# EAGLE board USB-Interface V1.0 (EAGLE 7.6.0)
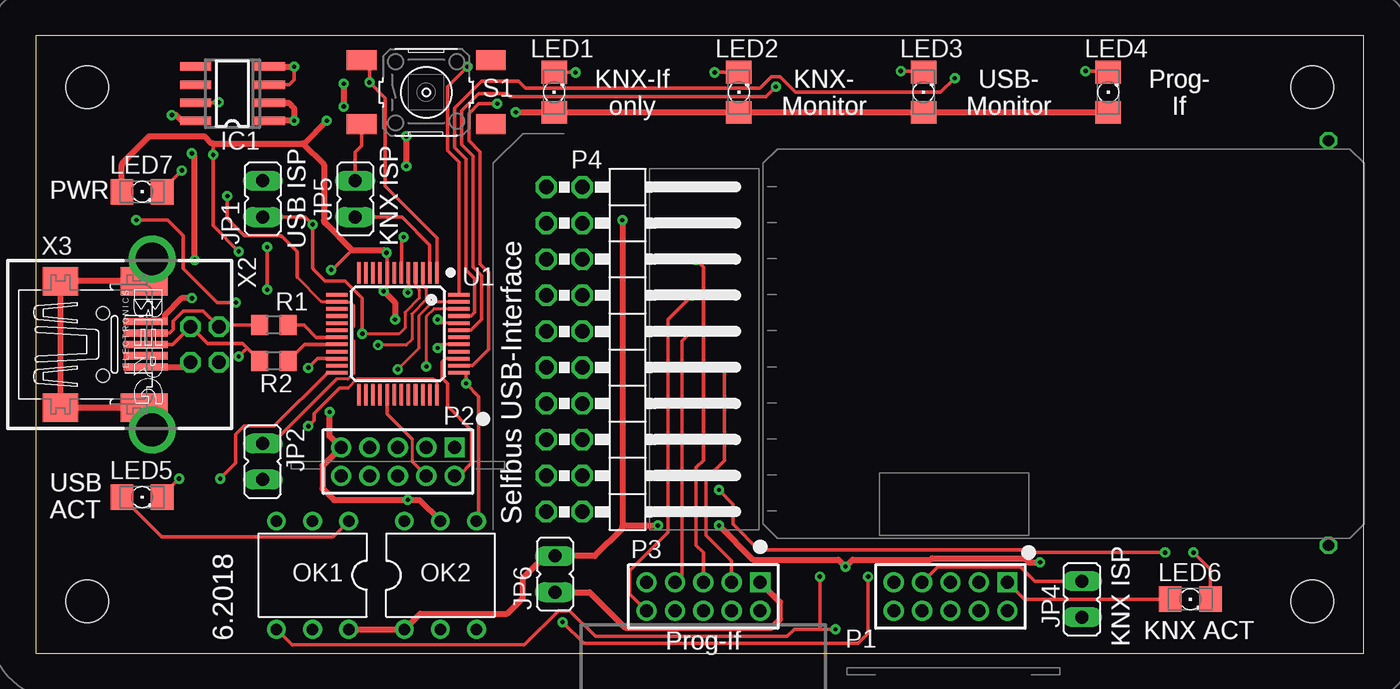
[diagram p0: board, top side]
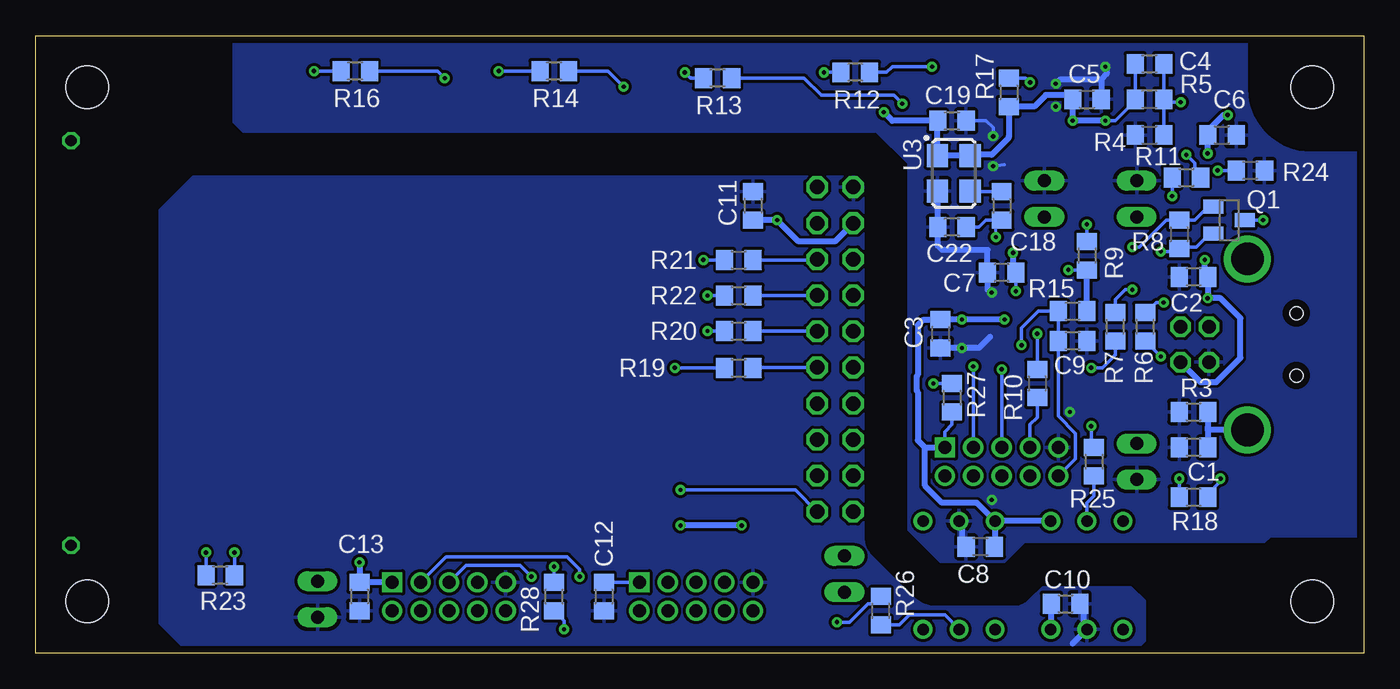
[diagram p1: board, bottom side, seen from below]

Size 93.5 x 43.5 mm. Coordinates in mm from the lower left corner, seen from the top.
Outline: 0,0 93.5,0 93.5,43.5 0,43.5 0,0
Copper layers (1*16): Top 0.035mm / dielectric 1.5mm / Bottom 0.035mm
Design rules "default *": minimum track width 8mil, minimum drill 0.3mm, track to track 8mil, track to pad 8mil, pad to pad 8mil, via to via 8mil, smd to smd 8mil, copper to edge 0.5mm, drill to drill 8mil, minimum pad ring 10mil, minimum via ring 8mil, stop-mask expansion 4mil, vias tented up to drill 0mil, thermal gap 10mil
Holes 3 mm at 89.85,3.65 3.65,39.85 89.85,39.85 3.65,3.65

## Footprints (pad centres in the part's own frame; a part is rotated, then mirrored left to right if it is on the bottom)
R0805M = smd 1.2 x 1.4: 1 -1,0; 2 1,0
SO08 = smd 0.6 x 2.2: 1 -1.905,-2.6; 2 -0.635,-2.6; 3 0.635,-2.6; 4 1.905,-2.6; 5 1.905,2.6; 6 0.635,2.6; 7 -0.635,2.6; 8 -1.905,2.6
JP1 = drill 0.914 long: 1 0,-1.27; 2 0,1.27
1206 = smd 1.6 x 1.803: A -1.422,0; C 1.422,0
DIL06S = drill 0.813: 1 -2.54,-3.81; 2 0,-3.81; 3 2.54,-3.81; 4 2.54,3.81; 5 0,3.81; 6 -2.54,3.81
2X05M = drill 0.914 square: 1 -4,-1 | drill 0.914: 2 -4,1; 3 -2,-1; 4 -2,1; 5 0,-1; 6 0,1; 7 2,-1; 8 2,1; 9 4,-1; 10 4,1
2X10/90 = drill 1.016 octagon: 1 -11.43,-6.35; 2 -11.43,-3.81; 3 -8.89,-6.35; 4 -8.89,-3.81; 5 -6.35,-6.35; 6 -6.35,-3.81; 7 -3.81,-6.35; 8 -3.81,-3.81; 9 -1.27,-6.35; 10 -1.27,-3.81; 11 1.27,-6.35; 12 1.27,-3.81; 13 3.81,-6.35; 14 3.81,-3.81; 15 6.35,-6.35; 16 6.35,-3.81; 17 8.89,-6.35; 18 8.89,-3.81; 19 11.43,-6.35; 20 11.43,-3.81
SOT23-BEC = smd 1 x 1.4: B -0.95,-1.1; C 0,1.1; E 0.95,-1.1
B3F-10XX_SMD = smd 2.1 x 1.4: 1 -4.55,2.25; 2 4.55,2.25; 3 -4.55,-2.25; 4 4.55,-2.25
LQFP48 = smd 1.5 x 0.25: 1 -4.3,2.75; 2 -4.3,2.25; 3 -4.3,1.75; 4 -4.3,1.25; 5 -4.3,0.75; 6 -4.3,0.25; 7 -4.3,-0.25; 8 -4.3,-0.75; 9 -4.3,-1.25; 10 -4.3,-1.75; 11 -4.3,-2.25; 12 -4.3,-2.75; 25 4.3,-2.75; 26 4.3,-2.25; 27 4.3,-1.75; 28 4.3,-1.25; 29 4.3,-0.75; 30 4.3,-0.25; 31 4.3,0.25; 32 4.3,0.75; 33 4.3,1.25; 34 4.3,1.75; 35 4.3,2.25; 36 4.3,2.75 | smd 0.25 x 1.5: 13 -2.75,-4.3; 14 -2.25,-4.3; 15 -1.75,-4.3; 16 -1.25,-4.3; 17 -0.75,-4.3; 18 -0.25,-4.3; 19 0.25,-4.3; 20 0.75,-4.3; 21 1.25,-4.3; 22 1.75,-4.3; 23 2.25,-4.3; 24 2.75,-4.3; 37 2.75,4.3; 38 2.25,4.3; 39 1.75,4.3; 40 1.25,4.3; 41 0.75,4.3; 42 0.25,4.3; 43 -0.25,4.3; 44 -0.75,4.3; 45 -1.25,4.3; 46 -1.75,4.3; 47 -2.25,4.3; 48 -2.75,4.3
ASF = smd 1.6 x 1.5: 1 -1.25,-1.15; 2 1.25,-1.15; 3 1.25,1.15; 4 -1.25,1.15
PN61729-S = drill 0.95 octagon: 1 1.25,4.71; 2 -1.25,4.71; 3 -1.25,2.71; 4 1.25,2.71 | drill 2.3 pad 2.9: S1 -6.02,0; S2 6.02,0
32005-201 = smd 3.1 x 0.5: 1 3,1.6; 2 3,0.8; 3 3,0; 4 3,-0.8; 5 3,-1.6 | smd 2.5 x 2: M1 -3,-4.45; M2 -3,4.45 | smd 3.3 x 2: M3 2.9,4.45; M4 2.9,-4.45 | hole 0.9: 0,2.2; 0,-2.2

## Placement (x,y rotation side)
C1  10n  [R0805M]  12,14.5 180 bottom
C2  10n  [R0805M]  12,26.5 180 bottom
C3  100n  [R0805M]  29.8,22.5 270 bottom
C4  -  [R0805M]  15.1,41.5 0 bottom
C5  1u0  [R0805M]  19.5,39 0 bottom
C6  1u0  [R0805M]  10,36.5 0 bottom
C7  100n  [R0805M]  25.5,26.8 180 bottom
C8  100n  [R0805M]  27,7.5 180 bottom
C9  10n  [R0805M]  20.5,22 180 bottom
C10  100n  [R0805M]  21,3.5 0 bottom
C11  100n  [R0805M]  43,31.5 270 bottom
C12  100n  [R0805M]  53.5,4 270 bottom
C13  100n  [R0805M]  70.7,4 270 bottom
C18  100p  [R0805M]  25.5,31.5 270 bottom
C19  100n  [R0805M]  29,37.5 0 bottom
C22  220p  [R0805M]  29,30 180 bottom
IC1  LP2951CM  [SO08]  13.87,39.4 90 top
JP1  [JP1]  16,32 0 top
JP2  [JP1]  16,13.5 180 top
JP4  [JP1]  73.66,3.81 180 top
JP5  [JP1]  22.5,32 0 top
JP6  [JP1]  36.56,5.58 0 top
LED1  [1206]  36.5,39.5 90 top
LED2  [1206]  49.5,39.5 90 top
LED3  [1206]  62.5,39.5 90 top
LED4  [1206]  75.5,39.5 90 top
LED5  [1206]  7.5,11 0 top
LED6  [1206]  81.28,3.81 0 top
LED7  [1206]  7.5,32.5 0 top
OK1  H11L1M  [DIL06S]  19.5,5.5 180 top
OK2  H11L1M  [DIL06S]  28.5,5.5 0 top
P1  ISP KNX-uC  [2X05M]  64.4,4 180 top
P2  ISP USB-uC  [2X05M]  25.5,13.5 180 top
P3  ISP USR-uC  [2X05M]  47,4 180 top
P4  [2X10/90]  42.3,21.4 270 top
Q1  BC857  [SOT23-BEC]  9.5,30.5 270 bottom
R1  33R  [R0805M]  16.78,23.13 180 top
R2  33R  [R0805M]  16.78,20.59 180 top
R3  100k  [R0805M]  12,17 0 bottom
R4  68k  [R0805M]  15.1,36.5 0 bottom
R5  120k  [R0805M]  15.1,39 180 bottom
R6  1k5  [R0805M]  15.4,23 90 bottom
R7  3k  [R0805M]  17.5,23 90 bottom
R8  24k  [R0805M]  13,29.5 270 bottom
R9  24k  [R0805M]  19.5,28 270 bottom
R10  330R  [R0805M]  23,19 270 bottom
R11  24k  [R0805M]  12.5,33.5 0 bottom
R12  1k5  [R0805M]  35.8,40.9 180 bottom
R13  1k5  [R0805M]  45.5,40.5 180 bottom
R14  1k5  [R0805M]  57,41 180 bottom
R15  100k  [R0805M]  20.5,24.1 0 bottom
R16  1k5  [R0805M]  71,41 180 bottom
R17  -  [R0805M]  25,39.5 270 bottom
R18  1k5  [R0805M]  12,11 0 bottom
R19  330R  [R0805M]  44,20.1 0 bottom
R20  330R  [R0805M]  44,22.7 0 bottom
R21  330R  [R0805M]  44,27.7 0 bottom
R22  330R  [R0805M]  44,25.2 0 bottom
R23  1k5  [R0805M]  80.5,5.5 180 bottom
R24  1k5  [R0805M]  8,34 180 bottom
R25  1k  [R0805M]  19,13.5 270 bottom
R26  1k  [R0805M]  34,3 90 bottom
R27  1k5  [R0805M]  29,18 270 bottom
R28  1k5  [R0805M]  57,4 90 bottom
S1  [B3F-10XX_SMD]  27.5,39.5 0 top
U1  LPC11U24FBD48/401  [LQFP48]  25.5,22.5 270 top
U3  XO32 12MHz  [ASF]  28.87,33.8 270 bottom
X2  PN61729-S  [PN61729-S]  8.2,21.75 270 top
X3  32005-201  [32005-201]  4.75,21.75 0 top

## Library data of the parts
C1-C13 C18 C19 C22 R1-R28 = rcl
IC1 = linear
JP1 JP2 JP4-JP6 = jumper
LED1-LED7 = led
OK1 OK2 = optocoupler
P1-P3 = pinhead-2
P4 = pinhead
Q1 = transistor-pnp
S1 = switch-omron
U1 = microbuilder
U3 = crystal
X2 = con-berg; OC_FARNELL: unknown; OC_NEWARK: unknown
X3 = con-cypressindustries; OC_FARNELL: unknown; OC_NEWARK: unknown

## Nets
+3V3: C3.1 C4.1 C5.1 C7.1 C8.1 C19.1 IC1.1 IC1.2 LED1.A LED2.A LED3.A LED4.A LED5.A LED7.A OK1.1 OK2.6 P2.1 Q1.E R5.2 R8.2 R9.2 R11.2 R15.2 R17.2 R27.2 U1.8 U1.44 U3.1 U3.4
+5V: C2.1 C6.1 IC1.8 X2.1 X3.1
/ISP_EN: JP1.1 R9.1 R10.1 U1.4
/RESET: C9.2 P2.10 R15.1 U1.3
GND: C1.2 C2.2 C3.2 C5.2 C6.2 C7.2 C8.2 C9.1 C19.2 C22.2 IC1.3 IC1.4 JP1.2 JP2.2 JP5.2 OK2.5 P2.9 R3.1 R4.1 R24.1 S1.3 U1.5 U1.41 U3.2 X2.4 X3.5
GNDA: C10.2 C11.1 C12.2 C13.2 JP4.2 OK1.5 P1.9 P3.9 P4.1
ISP_EN1: JP2.1 R11.1 U1.14
ISP_EN_EXT: P2.7 R10.2
ISP_RXD: P2.3 U1.46
ISP_TXD: P2.5 U1.47
K_ISP_EN: JP4.1 P1.7
K_RXD: OK1.4 P1.3 R28.1
K_TXD: P1.5 R26.2
N$1: R1.1 U1.19
N$2: R2.1 U1.20
N$3: JP5.1 U1.2
N$4: R1.2 X2.2 X3.2
N$5: R2.2 R6.1 X2.3 X3.3
N$6: C1.1 R3.2 X2.S1 X2.S2 X3.M1 X3.M2 X3.M3 X3.M4
N$7: Q1.B R7.2 R8.1
N$8: C4.2 IC1.7 R4.2 R5.1
N$9: Q1.C R6.2
N$10: R7.1 U1.22
N$11: LED6.C R23.2
N$12: P4.20 R23.1
N$13: R17.1 S1.1 U1.1
N$14: LED1.C R12.2
N$15: LED2.C R13.2
N$16: C18.1 U3.3
N$17: LED3.C R14.2
N$18: LED4.C R16.2
N$20: R16.1 U1.45
N$21: R14.1 U1.43
N$22: C18.2 C22.1 U1.6
N$23: R13.1 U1.38
N$24: R12.1 U1.48
N$25: LED7.C R24.2
N$27: R18.1 U1.24
N$28: LED5.C R18.2
N$29: P3.7 R20.1
N$30: C12.1 JP6.1 P3.1
N$31: OK1.2 R25.2
N$32: P3.10 R22.1
N$33: P3.5 R21.1
N$34: P3.3 R19.1
N$35: OK2.2 R26.1
SWCLK: P2.4 U1.29
SWDIO: P2.2 U1.39
SWUART_RX: P4.6 R21.2
SWUART_TX: P4.12 R19.2
U_RXD: OK2.4 R27.1 U1.37
U_TXD: R25.1 U1.36
USR_ISP: P4.10 R20.2
USR_RST: P4.8 R22.2
V+: C10.1 C11.2 C13.1 JP6.2 LED6.A OK1.6 OK2.1 P1.1 P4.3 R28.2

## Tracks (layer width: path | path; a pad name or v marks a point on that pad's centre or on a via)
+3V3  (via drill 0.3)
  Top 0.203: U1.44 28.55,23.25 v28.3,23.5
  Top 0.254: v24.5,25.5 24.75,25.75 U1.8 24.75,28.18 arc45 v24.7,28.2 | v20.8,27 v20.8,27 arc45 20.97,27.07 22.3,28.4 | 12.5,35.9 v12.5,35.1 12.5,30.1 v14.3,28.3 | LED5.A 8.8,8.27 arc45 8.98,8.2 20.82,8.2 arc45 21,8.27 OK1.1
  Top 0.406: v24.5,25.5 25.3,24.7 v25.3,23.5 | IC1.1 v18.2,37.5 18.2,38.4 17.84,38.77 IC1.2 | LED7.A 6.08,34.37 arc-45 6.15,34.55 8,36.4 11.9,36.4 12.4,35.9 12.5,35.9 18.8,35.9 | LED4.A LED3.A LED2.A LED1.A 36.48,38.1 v33.8,38.1 | v24.7,28.2 24.5,28.4 22.3,28.4 20.37,30.33 arc-45 20.3,30.5 20.3,34.4 18.8,35.9 | 18.8,35.9 18.9,35.9 v20.5,37.5
  Bottom 0.254: v24.5,25.5 C7.1 | C4.1 R5.2 16.1,38.9 17.5,37.5 v18.2,37.5 | Q1.E 10.85,29.55 11.8,28.6 12.9,28.6 R8.2 13,28.6 13.13,28.47 arc45 13.3,28.3 v14.3,28.3 | R9.2 v20.8,27 | R11.2 arc-45 11.57,33.67 11.9,34 11.9,34.5 v12.5,35.1 | R27.2 29,16.1 29.5,15.6 P2.1
  Bottom 0.406: 30.9,14.5 31.4,15 31.4,18.4 31.5,18.5 31.5,19.5 31.4,19.6 31.4,23.1 31,23.5 C3.1 v28.3,23.5 v25.3,23.5 | 30.9,14.5 P2.1 | OK2.6 25.96,7.54 C8.1 | OK1.1 OK2.6 | OK2.6 27.25,10.6 29.7,10.6 30.9,11.8 30.9,14.5 | R15.2 R9.2 | v18.2,37.5 v20.5,37.5 C5.1 20.5,39.3 22.4,39.3 23.2,38.5 R17.2 25,36.41 arc45 25.07,36.23 26.2,35.1 27.6,35.1 arc-45 U3.4 U3.1 30.02,37.48 C19.1 33.2,37.5 v33.8,38.1 | v24.7,28.2 24.7,27.11 arc-45 24.63,26.93 C7.1
+5V  (via drill 0.3)
  Top 0.406: v11,25 10.3,25 9.1,23.8 9.1,23.4 7.8,23.4 X3.1 | v11.2,27.7 11.2,35 v11,35.2 | v9.6,37.9 9.9,37.9 10.3,37.5 IC1.8
  Bottom 0.406: X2.1 11.51,19.1 10.4,19.1 8.7,20.8 8.7,23.6 10.1,25 v11,25 C2.1 arc90 11.2,26.7 v11.2,27.7 | v11,35.2 C6.1 11,36.8 9.9,37.9 v9.6,37.9
/ISP_EN  (via drill 0.3)
  Top 0.203: U1.4 26.75,25.85 27,25.6 27,25 26,24 26,22.9 25.6,22.5 v23,22.5
  Top 0.254: v23,22.5 23,25 21.8,26.2 20.4,26.2 19.57,27.03 arc-45 19.5,27.2 v19.5,30.2 18.97,30.73 JP1.1
  Bottom 0.254: R10.1 v23,22.5 | v19.5,30.2 R9.1
/RESET  (via drill 0.3)
  Top 0.203: U1.3 27.25,25.95 27.5,25.7 27.5,24.9 26.5,23.9 26.5,22.1 26.1,21.7 v24.1,21.7
  Bottom 0.254: P2.10 20.3,13.7 20.3,15.5 21.5,16.7 C9.2 R15.1 22.9,24.1 24.1,22.9 v24.1,21.7
GND  (via drill 0.3)
  Top 0.203: U1.5 26.25,25.45 v26.2,25.4 | U1.41 28.55,21.75 v28.3,21.5
  Top 0.254: JP5.2 22.5,35.3 22.95,35.75 S1.3 | IC1.3 17.84,40.03 18.2,40.4 v18.2,41.3
  Top 0.406: OK2.5 27.01,10.8 v26.2,10.8 21,10.8 20.2,11.6 20.2,13.2 P2.9 20.7,15.3 v20.7,17 | X3.5 10.56,20.15 X2.4 | IC1.4 18,41.3 v18.2,41.3 | v26.1,36.4 v26.1,34.3 | v21.7,40.1 v21.7,38.5
  Bottom 0.254: C19.2 26.6,37.5 26.1,37 v26.1,36.4 | v26.1,34.3 25.3,34.4
  Bottom 0.406: v26.2,25.4 26.5,25.6 C7.2 26.5,28.4 29.7,28.4 30,28.7 C22.2 30,32.53 U3.2 | C3.2 v28.3,21.5 27.1,21.5 26.3,22.3 | OK2.5 28.3,9.11 28.3,7.5 C8.2 | v18.2,41.3 18.1,40.8 18.5,40.4 | 18.5,40.4 C5.2 | 18.5,40.4 21.4,40.4 v21.7,40.1
  pour Bottom: 32.1,8.7 29.8,6.4 25.3,6.4 23.9,7.8 7,7.8 6.6,8.2 0,8.2 0,35.3 3.8,35.3 arc90 8.2,39.7 8.2,43.5 79.6,43.5 79.6,37.4 78.9,36.7 34.3,36.7 32.1,34.5
GNDA
  Bottom 0.406: C10.2 19.7,3.5 19.7,1.89 OK1.5 20.49,0.7
  pour Bottom (rank 2): 35.7,33.6 82.4,33.6 84.8,31.2 84.8,2.1 82.8,0.1 16.2,0.1 15.4,0.9 15.4,3.7 16.4,4.7 22.6,4.7 23.5,3.8 arc45 24.7,3.3 30.3,3.3 arc40 32,4.2 34.5,6.7 arc52 35.2,8.4 35.2,33.1
ISP_EN1  (via drill 0.3)
  Top 0.203: 21.2,19.3 22,19.3 22.4,19.7 22.4,22 22.3,22.1 22.3,22.9 22.4,23 22.4,24.5 22.15,24.75 U1.14 20.15,24.75 18.4,26.5 | 16.03,14.8 JP2.1
  Top 0.254: 21.2,19.3 16.7,14.8 16.03,14.8 | v13.5,32.2 13.5,30.6 14.63,29.47 arc45 14.8,29.4 17.2,29.4 arc-45 17.37,29.33 18.4,28.3 18.4,26.5
  Bottom 0.254: v13.5,32.2 R11.1
ISP_EN_EXT
  Bottom 0.254: R10.2 23,16.6 23.5,16.1 P2.7
ISP_RXD  (via drill 0.3)
  Top 0.203: U1.46 28.05,24.25 27.5,23.7 v27.5,20.2
  Bottom 0.254: P2.3 v27.5,20.2
ISP_TXD  (via drill 0.3)
  Top 0.203: U1.47 27.95,24.75 27,23.8 27,21.5 v25.5,20
  Bottom 0.254: P2.5 v25.5,20
K_ISP_EN
  Top 0.254: P1.7 63.5,6.1 69.3,6.1 70.32,5.08 JP4.1
K_RXD  (via drill 0.3)
  Top 0.254: OK1.4 18.07,0.6 34.4,0.6 36.8,3 37.6,3 39.4,1.2 52.9,1.2 53.4,1.7 55.2,1.7 | v56.3,1.7 55.2,1.7 | v55.2,5.4 55.2,1.7
  Bottom 0.254: R28.1 56.3,2.3 v56.3,1.7 | P1.3 64.6,6.8 56.1,6.8 55.2,5.9 v55.2,5.4
K_TXD  (via drill 0.3)
  Top 0.254: v37.1,2.2 38.6,0.7 57.9,0.7 58.6,1.4 v58.6,5.4
  Bottom 0.254: v37.1,2.2 36.2,2.2 34.9,3.5 34.7,3.5 34.2,4 R26.2 | P1.5 63.2,6.2 59.4,6.2 v58.6,5.4
N$1
  Top 0.254: U1.19 19.75,22.25 18.9,23.1 17.81,23.1 R1.1
N$2
  Top 0.254: U1.20 18.94,21.75 R2.1
N$3
  Top 0.203: 22.53,30.7 JP5.1
  Top 0.254: U1.2 27.75,28.75 25.8,30.7 22.53,30.7
N$4
  Top 0.254: X3.2 9.45,22.55 9.7,22.8 9.7,23.4 10.4,24.1 11.81,24.1 X2.2 13.04,23.13 R1.2
N$5  (via drill 0.3)
  Top 0.254: 14.88,21.48 14.57,21.8 12.11,21.8 X2.3 9.66,21.75 X3.3 | 14.88,21.48 R2.2 | v14.3,20.9 14.88,21.48
  Bottom 0.254: R6.1 v14.3,20.9
N$6
  Top 0.406: X2.S2 7.72,16.21 arc-45 7.65,16.39 X3.M4 X3.M1 1.75,25.95 arc-90 2,26.2 | X2.S1 8.2,26.86 arc-45 8.13,26.68 X3.M3 2,26.2 | 2,26.2 X3.M2
  Bottom 0.406: X2.S2 10.93,15.73 | 10.93,15.73 arc-45 11,15.7 C1.1 | R3.2 11,15.9 arc-45 10.93,15.73
N$7  (via drill 0.3)
  Top 0.254: v16.3,25.6 v16.3,28.6
  Bottom 0.254: Q1.B 10.95,31.45 11.9,30.5 R8.1 13.9,30.5 15.8,28.6 v16.3,28.6 | R7.2 17.5,24.9 16.8,25.6 v16.3,25.6
N$8  (via drill 0.3)
  Top 0.254: IC1.7 12.87,38.77 v12.9,38.8
  Bottom 0.254: C4.2 R5.1 14.1,38.8 | R4.2 14.1,38.8 | v12.9,38.8 14.1,38.8
N$9  (via drill 0.3)
  Top 0.254: v7.1,30.5 9.3,30.5 10.33,29.47 arc-45 10.4,29.3 10.4,27.1 12.8,24.7 v14.1,24.7
  Bottom 0.254: R6.2 arc-45 15.23,24.07 14.6,24.7 v14.1,24.7 | v7.1,30.5 Q1.C
N$10  (via drill 0.3)
  Top 0.254: U1.22 19.85,20.75 v19.2,20.1
  Bottom 0.254: R7.1 17.5,21.11 arc45 17.57,20.93 18.4,20.1 v19.2,20.1
N$11  (via drill 0.3)
  Top 0.254: LED6.C 82.7,5.9 v81.5,7.1
  Bottom 0.254: v81.5,7.1 R23.2
N$12  (via drill 0.3)
  Top 0.254: v48.1,11.5 49.1,10.5 49.1,9.1 50.9,7.3 69.9,7.3 70.1,7.1 v79.5,7.1
  Bottom 0.254: P4.20 40.02,11.5 v48.1,11.5 | v79.5,7.1 R23.1
N$13  (via drill 0.3)
  Top 0.254: U1.1 28.25,29.25 24.6,32.9 24.6,39.1 v23.5,40.2 23.5,41.09 arc45 23.43,41.27 S1.1
  Bottom 0.254: v23.5,40.2 23.73,40.43 arc-45 23.91,40.5 R17.1
N$14  (via drill 0.3)
  Top 0.254: v38,40.9 36.52,40.9 arc-90 LED1.C
  Bottom 0.254: R12.2 v38,40.9
N$15  (via drill 0.3)
  Top 0.254: v47.8,40.9 49.45,40.9 arc45 LED2.C
  Bottom 0.254: R13.2 47.3,40.5 arc45 47.47,40.57 v47.8,40.9
N$16
  Bottom 0.203: 27.67,32.5 U3.3
  Bottom 0.254: C18.1 27.67,32.5
N$17  (via drill 0.3)
  Top 0.254: v60.9,41 62.32,41 arc-45 LED3.C
  Bottom 0.254: R14.2 v60.9,41
N$18  (via drill 0.3)
  Top 0.254: v73.9,41 75.32,41 arc-45 LED4.C
  Bottom 0.254: R16.2 v73.9,41
N$19  (via drill 0.8)
  other vias: 91,36.1
N$20  (via drill 0.3)
  Top 0.254: U1.45 30.65,23.75 30.9,24 30.9,26.4 30.3,27 30.3,31.4 30.3,34.8 29.5,35.6 29.5,38.4 31.4,40.3 34,40.3 34.5,39.8 51,39.8 51.8,40.6 52.4,40.6 53.5,39.5 63.7,39.5 v64.7,40.5
  Bottom 0.254: v64.7,40.5 65.2,41 R16.1
N$21  (via drill 0.3)
  Top 0.254: U1.43 30.65,22.75 31.4,23.5 31.4,26.6 30.8,27.2 30.8,31.4 30.8,35 30,35.8 30,38.2 31.2,39.4 33.2,39.4 33.4,39.2 51.4,39.2 v52.1,39.9
  Bottom 0.254: R14.1 53.2,41 v52.1,39.9
N$22  (via drill 0.3)
  Top 0.254: U1.6 25.75,29.15 v25.9,29.3
  Bottom 0.203: v25.9,29.3 25.9,30.1 C18.2
  Bottom 0.254: C22.1 27.1,30 26.6,30.5 C18.2
N$23  (via drill 0.3)
  Top 0.254: U1.38 30.75,20.25 31.9,21.4 31.9,26.8 31.3,27.4 31.3,31.4 31.3,35.3 30.5,36.1 30.5,38 31.2,38.7 v32.5,38.7
  Bottom 0.254: R13.1 39.4,40.5 38.2,39.3 33.1,39.3 v32.5,38.7
N$24  (via drill 0.3)
  Top 0.254: U1.48 29.8,31.4 29.8,34.6 29,35.4 29,39.9 v30.4,41.3
  Bottom 0.254: R12.1 33.6,40.9 33.2,41.3 v30.4,41.3
N$25  (via drill 0.3)
  Top 0.254: LED7.C 8.92,32.62 v10.3,34
  Bottom 0.254: v10.3,34 R24.2
N$26  (via drill 0.8)
  other vias: 91,7.6
N$27  (via drill 0.3)
  Top 0.203: U1.24 20.55,19.75
  Top 0.254: 20.55,19.75 16.8,16 14.7,16 14.1,15.4 14.1,13.4 13.07,12.37 arc45 v13,12.3
  Bottom 0.254: R18.1 v13,12.3
N$28  (via drill 0.3)
  Top 0.254: LED5.C 8.92,11.02 arc-45 9,11.2 v10.1,12.3
  Bottom 0.254: v10.1,12.3 10.1,12.1 11,11.2 R18.2
N$29  (via drill 0.3)
  Top 0.254: P3.7 45.5,5.5 45.5,22 v46.2,22.7
  Bottom 0.254: v46.2,22.7 R20.1
N$30
  Top 0.406: JP6.1 38.99,4.31 41.5,1.8 51.8,1.8 52.4,2.4 52.4,3.6 P3.1
  Bottom 0.254: C12.1 P3.1
N$31
  Bottom 0.254: R25.2 19,11.1 19.5,10.6 OK1.2
N$32  (via drill 0.3)
  Top 0.254: v46.2,25.2 44.5,23.5 44.5,8.5 41.8,5.8 41.8,4.2 P3.10
  Bottom 0.254: R22.1 v46.2,25.2
N$33  (via drill 0.3)
  Top 0.254: P3.5 47,7.1 46.5,7.6 46.5,13.1 47,13.6 47,27.2 v46.5,27.7
  Bottom 0.254: v46.5,27.7 R21.1
N$34  (via drill 0.3)
  Top 0.254: v48.5,20.1 48.5,13.6 47.2,12.3 47.2,8.3 49,6.5 P3.3
  Bottom 0.254: R19.1 v48.5,20.1
N$35
  Bottom 0.254: OK2.2 29.51,2.7 32,2.7 32.7,2 R26.1
SWCLK
  Top 0.203: 26.5,15.1 26.5,13.5
  Top 0.254: U1.29 24.75,16.85 26.5,15.1 | 26.5,13.5 P2.4
SWDIO
  Top 0.254: U1.39 28.85,20.75 28.6,20.5 28.6,19.4 29,19 29,17.4 30.7,15.7 30.7,13.4 29.8,12.5 P2.2
SWUART_RX
  Bottom 0.254: R21.2 38.54,27.7 P4.6
SWUART_TX
  Bottom 0.254: P4.12 42.97,20.13 R19.2
U_RXD  (via drill 0.3)
  Top 0.254: OK2.4 31.2,9.47 31.2,18.1 v30.3,19 30.3,19.75 U1.37
  Bottom 0.254: R27.1 v30.3,19
U_TXD  (via drill 0.3)
  Top 0.203: U1.36 28.25,19.05 28,19.3 22.6,19.3 22,18.7
  Top 0.254: 22,18.7 21.4,18.7 19.6,16.9 19.6,16.4 v19.2,16
  Bottom 0.203: 19.2,14.7 R25.1
  Bottom 0.254: v19.2,16 19.2,14.7
USR_ISP
  Bottom 0.254: R20.2 38.52,22.7 P4.10
USR_RST
  Bottom 0.254: R22.2 P4.8
V+  (via drill 0.3)
  Top 0.254: LED6.A 69.59,3.81 P1.1
  Top 0.406: v41.3,30.5 41.3,8.95 | 41.3,8.95 41.3,8.8 39.35,6.85 JP6.2 36.51,6.8 35.8,6.8 34.3,5.3 34.3,3.9 33.2,2.8 27.07,2.8 OK2.1 OK1.6 | 41.3,8.95 41.35,9 v43.8,9 | v48.1,9 50.5,6.6 56.5,6.6 v57,6.1 57.5,6.6 63,6.6 63.1,6.7 69.6,6.7 69.9,6.4 v70.7,6.4
  Bottom 0.254: R28.2 v57,6.1
  Bottom 0.406: OK1.6 22,1.73 C10.1 | P4.3 37.24,29 39.8,29 v41.3,30.5 C11.2 | P1.1 C13.1 v70.7,6.4 | v43.8,9 v48.1,9

## Text on the board
tPlace: KNX-If / only | KNX- / Monitor | USB- / Monitor | Prog- / If | PWR | KNX ISP | USB ISP | USB / ACT | Selfbus USB-Interface | 6.2018 | Prog-If | KNX ACT | KNX ISP
_tsilk: KNX-If / only | KNX- / Monitor | USB- / Monitor | Prog- / If | PWR | KNX ISP | USB ISP | USB / ACT | Selfbus USB-Interface | 6.2018 | Prog-If | KNX ACT | KNX ISP